# Altium PCB PCB.pcbdoc
Units mm, origin at the board's own origin, x right, y up, seen from the top; angles counter-clockwise.
Board outline 109.98 x 81.6 mm, 2 copper layers (Top Layer, Bottom Layer); 9 components, 40 nets, 70 pads, 1 vias.
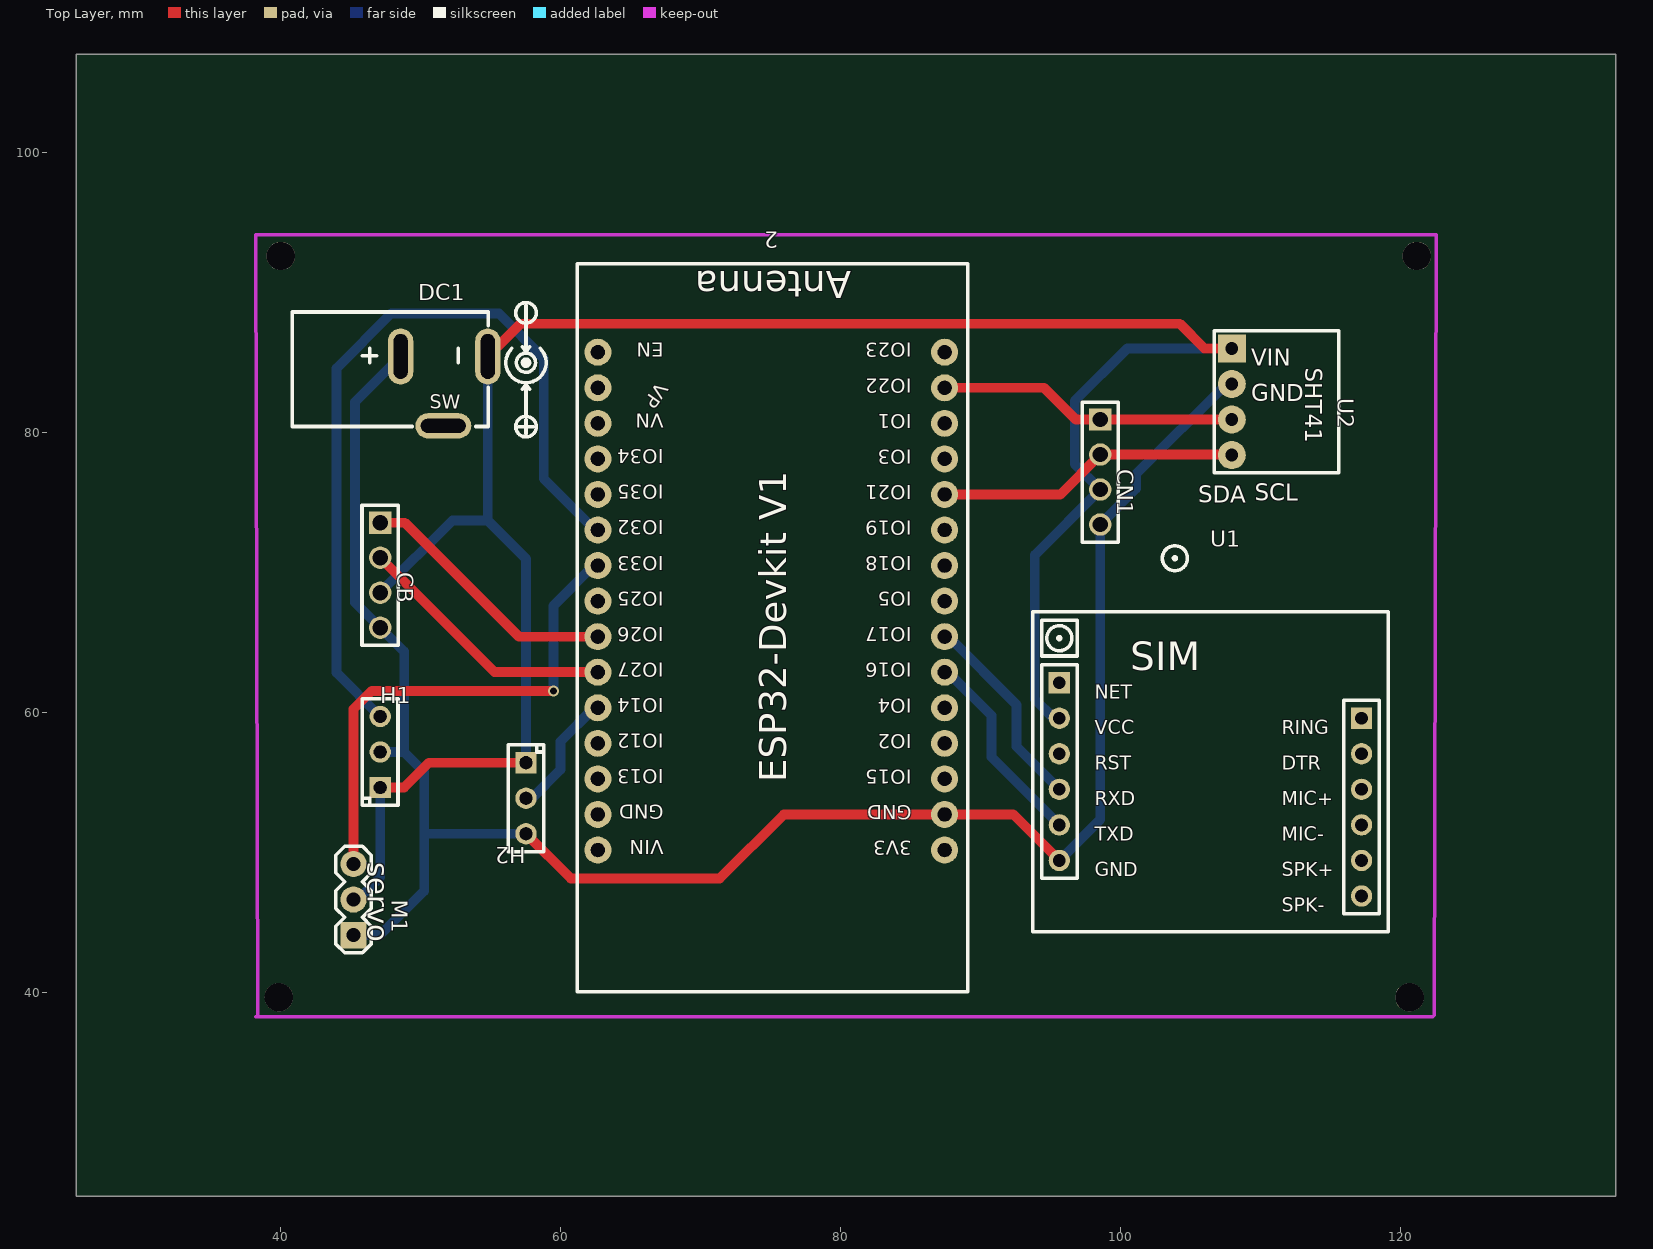
[diagram p0: Top Layer view]
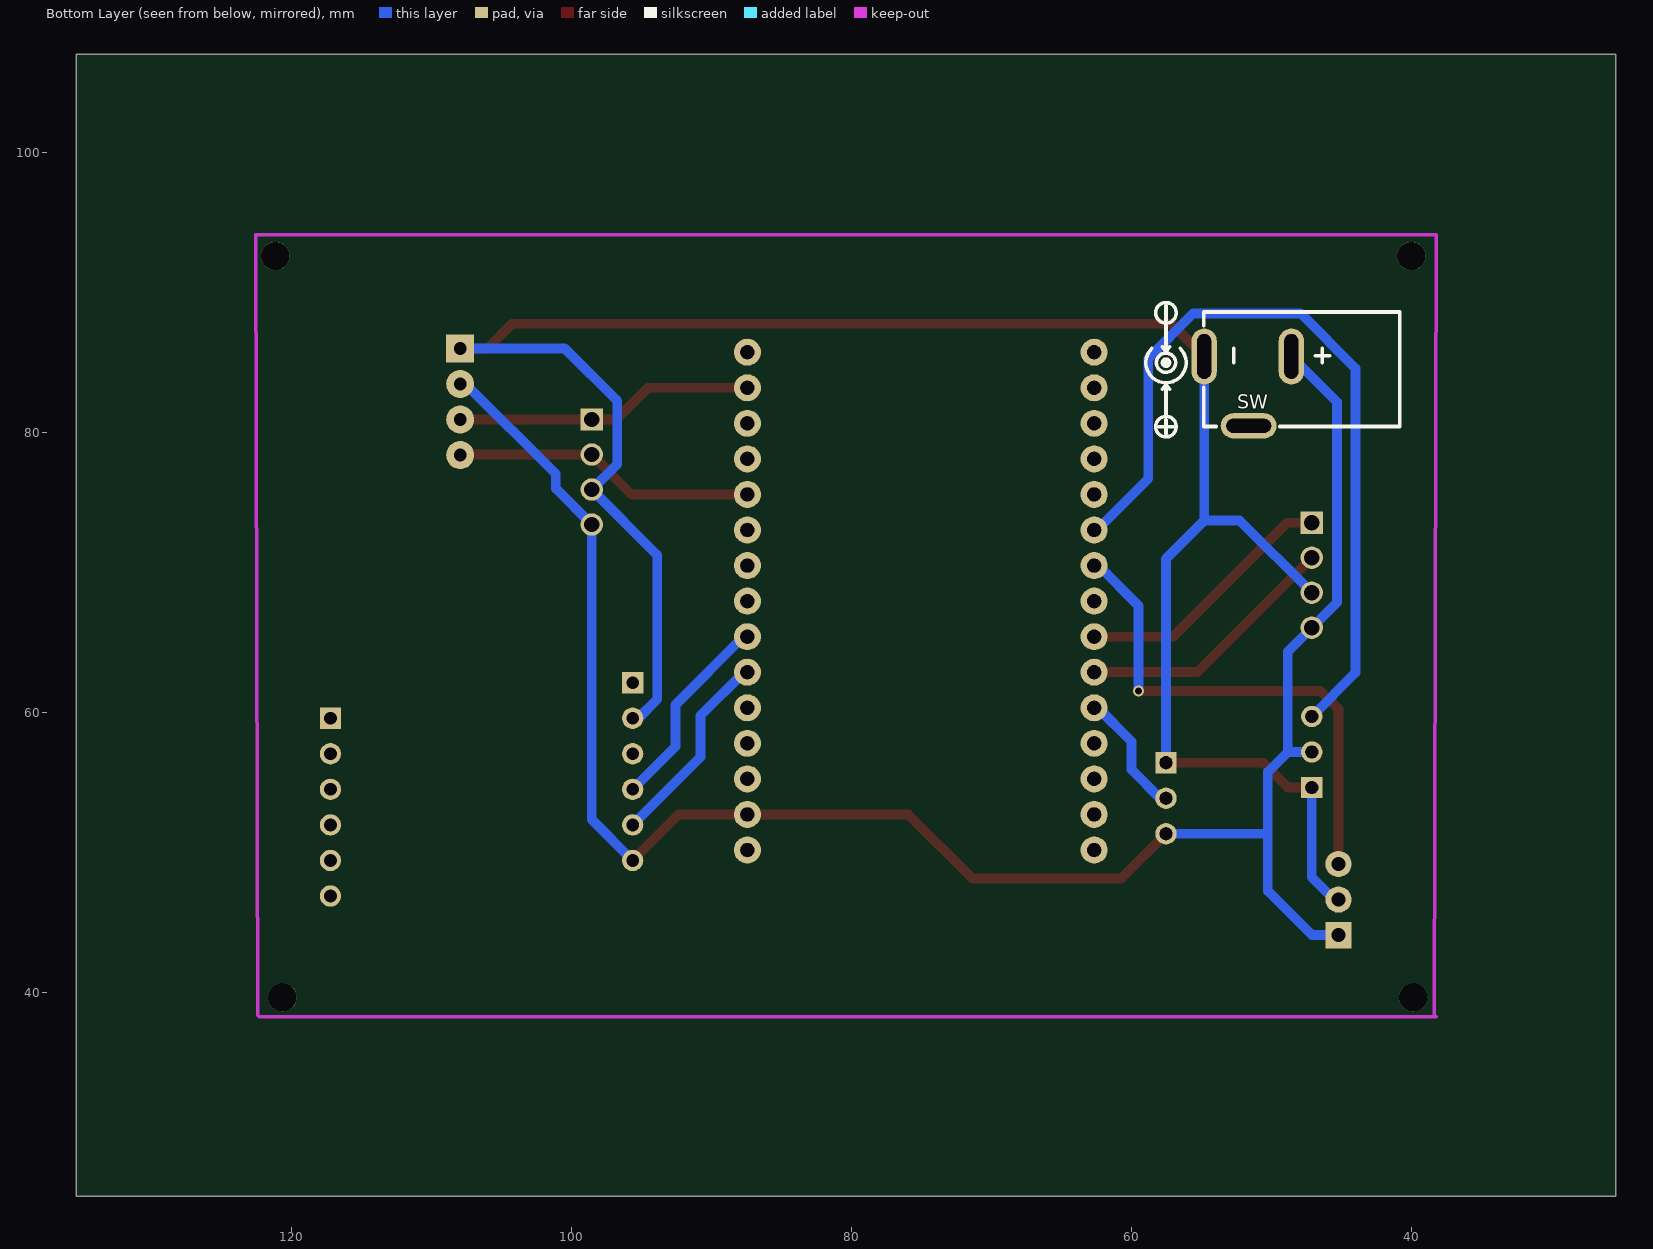
[diagram p1: Bottom Layer view, seen from below]

## Layer stack, top to bottom
Top Layer: signal copper (thickness not stored)
Dielectric: dielectric 0.32, FR-4, Dk 4.8
Bottom Layer: signal copper (thickness not stored)

## Board outline
135.382,25.4 25.4,25.4 25.4,106.998 135.382,106.998

## Components (designator, comment, footprint, x,y, rotation, side; value= is the part's Value field where it differs from the comment)
2 "ESP32 (DEVKITV1)" ESP32-DEVKITV1_ESP32-DEVKITV1 82.169,68.58 r0 top
CB "PMS7003" PINHEADER-4PIN 47.117,73.533 r270 top
CN1 "LCD i2c" PINHEADER-4PIN 98.552,80.899 r270 top
DC1 "JACK DC 2.1MM" JACKDC2.1MM 51.689,82.931 r0 top
H1 "Relay" HEADER-3PIN 47.117,54.61 r0 top
H2 "DP" HEADER-3PIN 57.531,56.388 r180 top
M1 "Servo_PWM" SERVO 45.212,46.609 r270 top
U1 "SIM" SIM800L 106.426,55.118 r0 top
U2 "SHT41 board" "SHT41 BOARD AU" 107.95,82.169 r270 top

## Footprints (in the part's own frame and the unit in brackets; to place one, negate y for a bottom-side part, rotate by r counter-clockwise, add the part's x,y. Pads: shape width x height; smd on the part's side, far side on the other; paste and mask are expansions set on the pad)
ESP32-DEVKITV1_ESP32-DEVKITV1 [mil]
  round 76 hole 39.36 paste+0 mask+2: 3V3(207.32,-725.63) D2(207.32,-425.64) D4(207.32,-325.64) D5(207.32,-25.64) D12(-767.89,-425.64) D13(-767.89,-525.64) D14(-767.89,-325.64) D15(207.32,-525.64) D18(207.32,74.36) D19(207.32,174.36) D21(207.32,274.36) D22(207.32,574.36) D23(207.32,674.36) D25(-767.89,-25.64) D26(-767.89,-125.64) D27(-767.89,-225.64) D32(-767.89,174.36) D33(-767.89,74.36) D34(-767.89,374.36) D35(-767.89,274.36) EN(-767.89,674.36) GND(207.32,-625.64) GND2(-767.89,-625.64) RX0(207.32,374.36) RX2(207.32,-225.64) TX0(207.32,474.36) TX2(207.32,-125.64) VIN(-767.89,-725.63) VN(-767.89,474.36) VP(-767.89,574.36)
  silkscreen extent -826,-1124 273,923
HEADER-3PIN [mil]
  rect 60x60 hole 36 slot 36.2 at 0 deg paste+0 mask+2: 1(0,0)
  round 60 hole 36 slot 36.2 at 0 deg paste+0 mask+2: 2(0,100) 3(0,200)
  silkscreen extent -50,-50 50,250
JACKDC2.1MM [mm]
  oval 1.8x4 hole 1 slot 3.2 at 90 deg paste+0 mask+0.102: +(-3.111,2.476) -(3.111,2.476)
  oval 4x1.8 hole 1 slot 3.2 at 0 deg paste+0 mask+0.102: SW(-0.064,-2.476)
  silkscreen extent -10.86,-3.28 7.28,6.32
PINHEADER-4PIN [mm]
  rect 1.6x1.6 hole 1.1 paste+0 mask+0.102: 1(0,0)
  round 1.6 hole 1.1 paste+0 mask+0.102: 2(2.5,0) 3(5,0) 4(7.5,0)
  silkscreen extent -1.25,-1.3 8.75,1.3
SERVO [mil]
  round 74 hole 40 paste+0 mask+4: 1(-100,0) 2(0,0)
  rect 74x74 hole 40 paste+0 mask+4: 3(100,0)
  silkscreen extent -150,-50 150,50
"SHT41 BOARD AU" [mm]
  rect 2x2 hole 0.914 paste+0 mask+0.051: 1(-3.81,0)
  round 2 hole 0.914 paste+0 mask+0.051: 2(-1.27,0) 3(1.27,0) 4(3.81,0)
  silkscreen extent -5.08,-1.26 5.08,7.63
SIM800L [mil]
  rect 60x60 hole 36 paste+0 mask+4: 1(-425,275) 12(425,175)
  round 60 hole 36 paste+0 mask+4: 2(-425,175) 3(-425,75) 4(-425,-25) 5(-425,-125) 6(-425,-225) 7(425,-325) 8(425,-225) 9(425,-125) 10(425,-25) 11(425,75)
  silkscreen extent -500,-425 500,660

## Free pads (board coordinates)
  round 2.032 hole 2.032 unplated paste+0: ""(39.878,39.624) ""(40.005,92.583) ""(120.65,39.624) ""(121.158,92.583)

## Via types
v1: diameter 0.8, hole 0.5, Top Layer to Bottom Layer, tented both sides, 1 vias

## Nets (pads, with @x,y where several pads share a name; then routed paths per layer and width w, separated by ;. In a path a pad name is that pad's centre, name@x,y a point inside that pad or via, vN(x,y) a via of type N, cw(c..) or ccw(c..) an arc to the next point about the centre after c; other vN are vias at no path point)
2_3V3: 2.3V3
2_D2: 2.D2
2_D4: 2.D4
2_D5: 2.D5
2_D12: 2.D12
2_D13: 2.D13
2_D15: 2.D15
2_D18: 2.D18
2_D19: 2.D19
2_D23: 2.D23
2_D25: 2.D25
2_D34: 2.D34
2_D35: 2.D35
2_EN: 2.EN
2_GND2: 2.GND2
2_RX0: 2.RX0
2_TX0: 2.TX0
2_VIN: 2.VIN
2_VN: 2.VN
2_VP: 2.VP
DATA: 2.D14 H2.2 | length 9
  Bottom Layer w0.7: H2.2 57.959,53.848 59.996,55.885 59.996,57.896 62.409,60.309 2.D14
DC1_SW: DC1.SW
FAN: 2.D32 H1.3 | length 57.9
  Bottom Layer w0.7: H1.3 43.99,62.817 43.99,84.557 47.899,88.465 55.608,88.465 58.796,85.277 58.796,76.674 62.462,73.009 2.D32
GND: 2.GND CB.4 CN1.4 DC1.+ H1.2 H2.3 M1.3 U1.6 U2.2 | length 139
  Top Layer w0.7: H2.3 60.734,48.105 71.367,48.105 75.95,52.689 2.GND 92.345,52.689 U1.6
  Bottom Layer w0.7: M1.3 47.102,44.069 50.26,47.227 50.26,51.308 ; H1.2 48.831,57.15 ; DC1.+ 45.319,82.149 45.319,67.83 CB.4 48.831,64.319 48.831,57.15 ; H2.3 50.26,51.308 ; U1.6 98.552,52.324 CN1.4 101.121,75.968 101.121,77 107.56,83.439 U2.2 ; 48.831,57.15 50.26,55.721 50.26,51.308
RX: 2.RX2 U1.5 | length 14.4
  Bottom Layer w0.7: 2.RX2 87.68,62.849 90.775,59.755 90.775,56.799 U1.5
RX2: 2.D26 CB.1 | length 18.9
  Top Layer w0.7: CB.1 48.867,73.533 57.012,65.389 2.D26
SCL: 2.D22 CN1.1 U2.3 | length 21.5
  Top Layer w0.7: 2.D22 94.532,83.169 96.802,80.899 CN1.1 U2.3
SDA: 2.D21 CN1.2 U2.4 | length 21.7
  Top Layer w0.7: 2.D21 95.702,75.549 CN1.2 107.91,78.399 U2.4
SERVO: 2.D33 M1.1 | length 36.3
  Top Layer w0.7: M1.1 45.212,60.219 46.507,61.513 v1(59.496,61.513)
  Bottom Layer w0.7: v1(59.496,61.513) 59.496,67.598 62.367,70.469 2.D33
TX: 2.TX2 U1.4 | length 14.5
  Bottom Layer w0.7: 2.TX2 87.718,65.389 92.579,60.528 92.579,57.535 U1.4
TX2: 2.D27 CB.2 | length 18.9
  Top Layer w0.7: CB.2 55.285,62.865 62.648,62.865 2.D27
U1_1: U1.1
U1_3: U1.3
U1_7: U1.7
U1_8: U1.8
U1_9: U1.9
U1_10: U1.10
U1_11: U1.11
U1_12: U1.12
VCC: CB.3 CN1.3 DC1.- H1.1 H2.1 M1.2 U1.2 U2.1 | length 154
  Top Layer w0.7: H1.1 48.829,54.61 50.607,56.388 H2.1 ; DC1.- 57.134,87.741 104.238,87.741 106,85.979 U2.1
  Bottom Layer w0.7: M1.2 45.526,46.609 47.117,48.2 H1.1 ; CB.3 52.272,73.688 54.8,73.688 ; DC1.- 54.8,73.688 ; H2.1 57.531,70.957 54.8,73.688 ; U1.2 95.231,59.563 93.881,60.913 93.881,71.228 CN1.3 96.726,77.725 96.726,82.222 100.484,85.979 U2.1

## Text inside footprints (layer, text, board x,y; h text height)
2: Document "ESP32-DEVKITV1" at 91.135,78.019 h1.27 r90; Top Overlay "3V3" at 85.095,50.809 h1.02 r180; Top Overlay "GND" at 85.095,53.349 h1.02 r180; Top Overlay "IO15" at 85.095,55.889 h1.02 r180; Top Overlay "IO2" at 85.095,58.429 h1.02 r180; Top Overlay "IO4" at 85.095,60.969 h1.02 r180; Top Overlay "IO16" at 85.095,63.509 h1.02 r180; Top Overlay "IO17" at 85.095,66.049 h1.02 r180; Top Overlay "IO5" at 85.095,68.589 h1.02 r180; Top Overlay "IO18" at 85.095,71.129 h1.02 r180; Top Overlay "IO19" at 85.095,73.669 h1.02 r180; Top Overlay "IO21" at 85.095,76.209 h1.02 r180; Top Overlay "IO3" at 85.095,78.749 h1.02 r180; Top Overlay "IO1" at 85.095,81.289 h1.02 r180; Top Overlay "IO22" at 85.095,83.829 h1.02 r180; Top Overlay "IO23" at 85.095,86.369 h1.02 r180; Top Overlay "VIN" at 67.375,50.829 h1.02 r180; Top Overlay "GND" at 67.375,53.369 h1.02 r180; Top Overlay "IO13" at 67.375,55.909 h1.02 r180; Top Overlay "IO12" at 67.375,58.449 h1.02 r180; Top Overlay "IO14" at 67.375,60.989 h1.02 r180; Top Overlay "IO27" at 67.375,63.529 h1.02 r180; Top Overlay "IO26" at 67.375,66.069 h1.02 r180; Top Overlay "IO25" at 67.375,68.609 h1.02 r180; Top Overlay "IO33" at 67.375,71.149 h1.02 r180; Top Overlay "IO32" at 67.375,73.689 h1.02 r180; Top Overlay "IO35" at 67.375,76.229 h1.02 r180; Top Overlay "IO34" at 67.375,78.769 h1.02 r180; Top Overlay "VN" at 67.375,81.309 h1.02 r180; Top Overlay "VP" at 66.959,83.632 h1.02 r235; Top Overlay "EN" at 67.375,86.389 h1.02 r180; Top Overlay "ESP32-Devkit V1" at 76.13,54.985 h1.93 r90; Top Overlay "Antenna" at 80.753,91.51 h1.93 r180
DC1: Bottom Overlay "SW" at 52.453,81.669 h1; Top Overlay "SW" at 50.673,81.669 h1
M1: Top Overlay "servo" at 46.24,49.276 h1.5 r270
U1: Top Overlay "NET" at 98.171,60.968 h1; Top Overlay "VCC" at 98.171,58.428 h1; Top Overlay "RST" at 98.171,55.888 h1; Top Overlay "RXD" at 98.171,53.348 h1; Top Overlay "TXD" at 98.171,50.808 h1; Top Overlay "GND" at 98.171,48.268 h1; Top Overlay "RING" at 111.506,58.428 h1; Top Overlay "DTR" at 111.506,55.888 h1; Top Overlay "MIC+" at 111.506,53.348 h1; Top Overlay "MIC-" at 111.506,50.808 h1; Top Overlay "SPK+" at 111.506,48.268 h1; Top Overlay "SPK-" at 111.506,45.728 h1
U2: Top Overlay "VIN" at 109.347,84.744 h1.2; Top Overlay "SHT41" at 113.192,84.582 h1.2 r270; Top Overlay "GND" at 109.347,82.204 h1.2; Top Overlay "SCL" at 109.601,75.092 h1.2; Top Overlay "SDA" at 105.537,74.965 h1.2